# Altium PCB AT89S52S双L298驱动控制器.PCBDOC
Units mm, origin at the board's own origin, x right, y up, seen from the top; angles counter-clockwise.
Board outline 152.4 x 101.6 mm, 2 copper layers (Top Layer, Bottom Layer); 67 components, 59 nets, 237 pads, 2 vias.
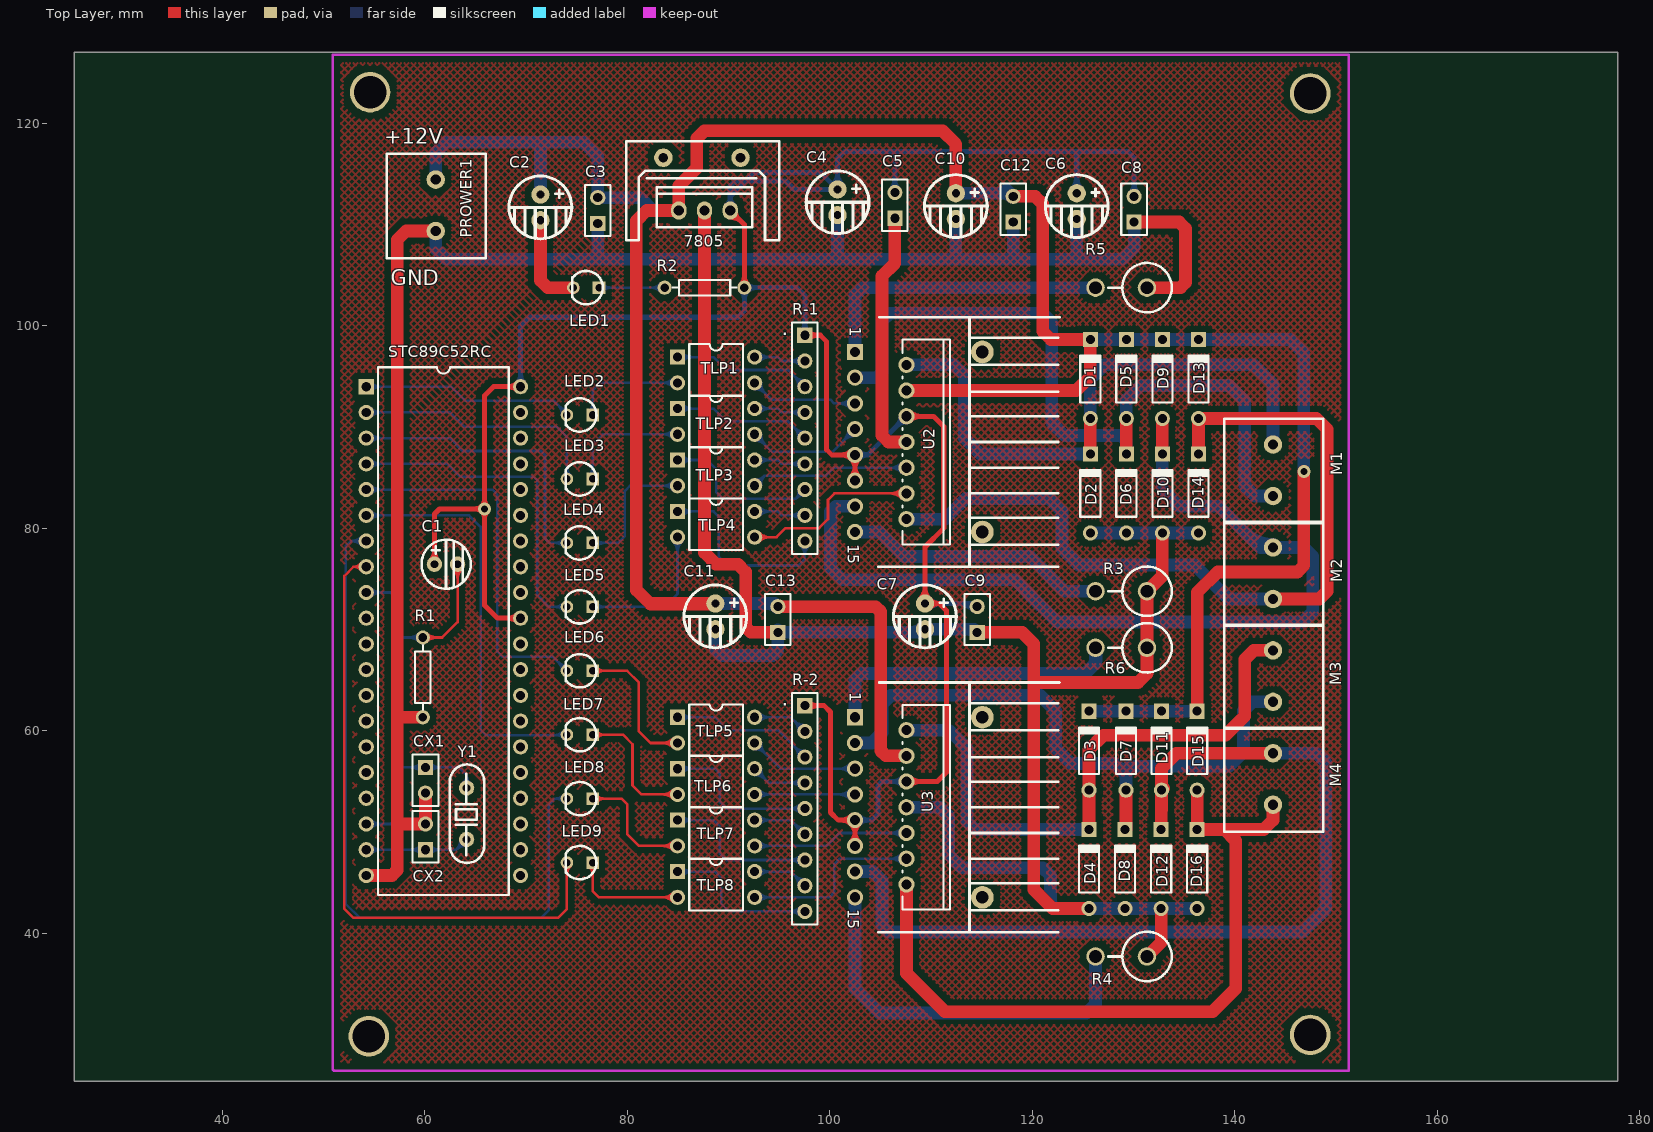
[diagram p0: Top Layer view]
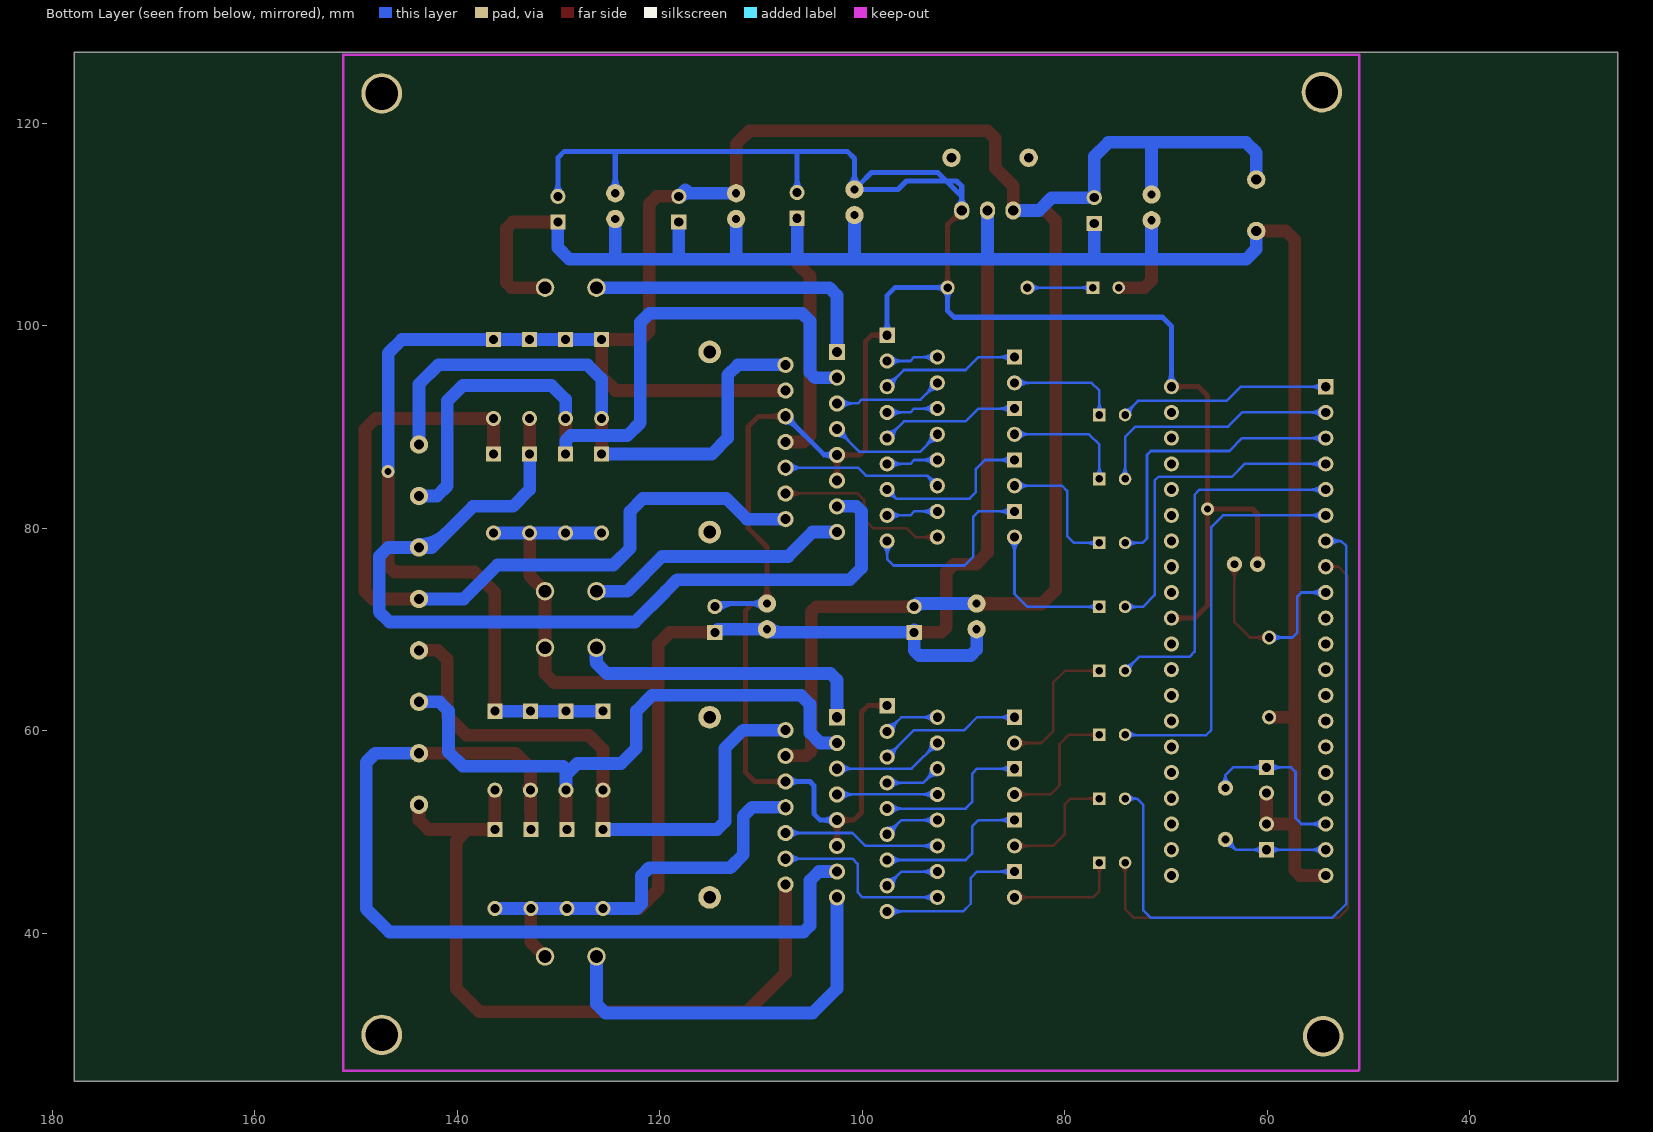
[diagram p1: Bottom Layer view, seen from below]

## Layer stack, top to bottom
Top Layer: signal copper 0.0356
Dielectric: dielectric 0.32, FR-4, Dk 4.8
Bottom Layer: signal copper 0.0356

## Board outline
25.4,25.4 177.8,25.4 177.8,127 25.4,127

## Design rules (kind name [scope] priority, off if disabled: settings)
Clearance [All] p1: gap=0.6
ComponentClearance [All] p1: gap=0.254 collisioncheckmode=3 verticalgap=0.254
PolygonConnect [All] p1: connectstyle=Relief reliefconductorwidth=0.254 reliefentries=4 polygonreliefangle="90 Angle"
RoutingVias [All] p1: holewidth=0.711 width=1.27 viastyle="Through Hole" minholewidth=0.711 minwidth=1.27 maxholewidth=0.711 maxwidth=1.27
SolderMaskExpansion [All] p1: expansion=0.102
TestPointUsage [All] p1: valid=0 allowmultiple=FALSE
Testpoint [All] p1: side=15 testpointundercomponent=TRUE minsize=1.016 maxsize=2.54 preferedsize=1.524 minholesize=0 maxholesize=1.016 preferedholesize=0.813 testpointgrid=0.025 style=1023 order=0-112345678
Width 1.2mm [InNetClass('1.2mm')] p1: maxlimit=1.254 minlimit=1.254 preferedwidth=1.254
Width 0.5mm [InNetClass('0.5mm')] p2: maxlimit=0.5 minlimit=0.5 preferedwidth=0.5
Width [All] p3: maxlimit=0.254 minlimit=0.254 preferedwidth=0.254
17 further rules are at their usual default settings.

## Classes and differential pairs
net class 0.5mm: +5V
net class 1.2mm: +12V GND NetD1_1 NetD3_1 NetD5_1 NetD7_1 NetD9_1 NetD11_1 NetD13_1 NetD15_1 NetR3_2 NetR4_2 NetR5_2 NetR6_2

## Components (designator, comment, footprint, x,y, rotation, side; value= is the part's Value field where it differs from the comment)
7805 "SDWYG" WYG 87.63,111.379 r0 top
C1 "10uf" C-DJ-4 63.373,73.914 r0 top
C2 "DJDR" C-DJ-6 71.501,110.363 r270 top
C3 "CPDR" CPDR 77.089,111.379 r90 top
C4 "DJDR" C-DJ-6 100.838,110.871 r270 top
C5 "CPDR" CPDR 106.426,111.887 r90 top
C6 "" C-DJ-6 124.46,110.49 r270 top
C7 "" C-DJ-6 109.474,69.977 r270 top
C8 "104" CPDR 130.048,111.506 r90 top
C9 "104" CPDR 114.554,70.993 r90 top
C10 "" C-DJ-6 112.522,110.49 r270 top
C11 "" C-DJ-6 88.773,69.977 r270 top
C12 "104" CPDR 118.11,111.506 r90 top
C13 "104" CPDR 94.869,70.993 r90 top
CX1 "30p" HDR1X2 60.071,56.388 r270 top
CX2 "30p" HDR1X2 60.071,48.26 r90 top
D1 "1N4007" DIO7.8-4.6x2 125.73,94.742 r90 top
D2 "1N4007" DIO7.8-4.6x2 125.73,83.439 r90 top
D3 "1N4007" DIO7.8-4.6x2 125.603,58.039 r90 top
D4 "1N4007" DIO7.8-4.6x2 125.603,46.355 r90 top
D5 "1N4007" DIO7.8-4.6x2 129.286,94.742 r90 top
D6 "1N4007" DIO7.8-4.6x2 129.286,83.439 r90 top
D7 "1N4007" DIO7.8-4.6x2 129.244,58.039 r90 top
D8 "1N4007" DIO7.8-4.6x2 129.159,46.355 r90 top
D9 "1N4007" DIO7.8-4.6x2 132.842,94.742 r90 top
D10 "1N4007" DIO7.8-4.6x2 132.842,83.439 r90 top
D11 "1N4007" DIO7.8-4.6x2 132.757,58.039 r90 top
D12 "1N4007" DIO7.8-4.6x2 132.715,46.355 r90 top
D13 "1N4007" DIO7.8-4.6x2 136.398,94.742 r90 top
D14 "1N4007" DIO7.8-4.6x2 136.398,83.439 r90 top
D15 "1N4007" DIO7.8-4.6x2 136.271,58.039 r90 top
D16 "1N4007" DIO7.8-4.6x2 136.271,46.355 r90 top
LED1 "LED" LED_D#1 75.438,102.235 r180 top
LED2 "" LED_D#2 74.803,92.71 r180 top
LED3 "" LED_D#2 74.803,86.396 r180 top
LED4 "" LED_D#2 74.803,80.083 r180 top
LED5 "" LED_D#2 74.803,73.769 r180 top
LED6 "" LED_D#2 74.803,67.455 r180 top
LED7 "" LED_D#2 74.803,61.141 r180 top
LED8 "" LED_D#2 74.803,54.828 r180 top
LED9 "" LED_D#2 74.803,48.514 r180 top
M1 "" DYDZ 144.907,87.757 r0 top
M2 "" DYDZ 144.907,77.597 r0 top
M3 "" DYDZ 144.907,67.437 r0 top
M4 "" DYDZ 144.907,57.277 r0 top
PROWER1 "PZ_2" DYDZ 62.23,113.919 r0 top
R1 "10k" RSE 59.817,65.278 r90 top
R2 "Res" RSE 87.63,103.759 r0 top
R3 "Res2" ZCDZL 128.778,71.247 r270 top
R4 "Res2" ZCDZL 128.778,35.179 r270 top
R5 "Res2" ZCDZL 128.778,101.219 r270 top
R6 "Res2" ZCDZL 128.778,65.659 r270 top
R-1 "" HDR1X9 97.536,78.74 r90 top
R-2 "" HDR1X9 97.536,42.164 r90 top
STC89C52RC "STC89C52RC" DIP-40 61.849,69.85 r270 top (schematic designator U1)
TLP1 "" DIP-4 88.773,95.631 r270 top (schematic designator TLP2)
TLP2 "" DIP-4 88.773,90.551 r270 top
TLP3 "" DIP-4 88.773,85.471 r270 top
TLP4 "" DIP-4 88.773,80.391 r270 top
TLP5 "" DIP-4 88.773,60.071 r270 top (schematic designator TLP6)
TLP6 "" DIP-4 88.773,54.991 r270 top
TLP7 "" DIP-4 88.773,49.911 r270 top
TLP8 "" DIP-4 88.773,44.831 r270 top
U2 "L298N" L298N 107.442,88.519 r270 top
U3 "L298N" L298N 107.442,52.451 r270 top
Y1 "Y" JZ_ZC 64.135,54.356 r90 top
? "Comment" SRP 87.376,112.776 r0 top

## Footprints (in the part's own frame and the unit in brackets; to place one, negate y for a bottom-side part, rotate by r counter-clockwise, add the part's x,y. Pads: shape width x height; smd on the part's side, far side on the other; paste and mask are expansions set on the pad)
C-DJ-4 [mil] "电容4mm"
  round 60 hole 30: 1(-95,100) 2(-5,100)
  silkscreen extent -145,5 46,195
C-DJ-6 [mm] "电容6mm"
  round 1.8 hole 0.8: 1(-2.591,-0.076) 2(-0.051,-0.076)
  silkscreen extent -4.42,-3.18 1.78,3.02
CPDR [mm] "瓷片电容"
  rect 1.5x1.5 hole 0.9: 1(-1.27,0)
  round 1.5 hole 0.9: 2(1.27,0)
  silkscreen extent -2.54,-1.27 2.54,1.27
DIO7.8-4.6x2 [mm] "Diode, Axial; Body 4.6 x 1.9 mm (LxDia. max), Lead Dia. 0.53 mm (max)"
  round 1.5 hole 0.9: 1(-3.9,0)
  rect 1.5x1.5 hole 0.9: 2(3.9,0)
  silkscreen extent -2.3,-1 2.4,1
DIP-4 [mm] "DIP; 4 Leads; Row Spacing 7.62 mm; Pitch 2.54 mm"
  rect 1.5x1.5 hole 0.9: 1(-1.27,-3.81)
  round 1.5 hole 0.9: 2(1.27,-3.81) 3(1.27,3.81) 4(-1.27,3.81)
  silkscreen extent -2.55,-2.65 2.55,2.65
DIP-40 [mm] "直插40管脚"
  rect 1.5x1.5 hole 0.9: 1(-24.13,-7.62)
  round 1.5 hole 0.9: 2(-21.59,-7.62) 3(-19.05,-7.62) 4(-16.51,-7.62) 5(-13.97,-7.62) 6(-11.43,-7.62) 7(-8.89,-7.62) 8(-6.35,-7.62) 9(-3.81,-7.62) 10(-1.27,-7.62) 11(1.27,-7.62) 12(3.81,-7.62) 13(6.35,-7.62) 14(8.89,-7.62) 15(11.43,-7.62) 16(13.97,-7.62) 17(16.51,-7.62) 18(19.05,-7.62) 19(21.59,-7.62) 20(24.13,-7.62) 21(24.13,7.62) 22(21.59,7.62) 23(19.05,7.62) 24(16.51,7.62) 25(13.97,7.62) 26(11.43,7.62) 27(8.89,7.62) 28(6.35,7.62) 29(3.81,7.62) 30(1.27,7.62) 31(-1.27,7.62) 32(-3.81,7.62) 33(-6.35,7.62) 34(-8.89,7.62) 35(-11.43,7.62) 36(-13.97,7.62) 37(-16.51,7.62) 38(-19.05,7.62) 39(-21.59,7.62) 40(-24.13,7.62)
  silkscreen extent -26.05,-6.45 26.05,6.45
DYDZ [mil] "接线端子"
  round 71.81 hole 39.37: 1(-45,20) 2(-45,-180)
  silkscreen extent -235,-285 150,120
HDR1X2 [mm] "Connector; Header; 2 Position"
  rect 1.5x1.5 hole 0.9: 1(0,0)
  round 1.5 hole 0.9: 2(2.54,0)
  silkscreen extent -1.27,-1.27 3.81,1.27
HDR1X9 [mm] "Connector; Header; 9 Position"
  round 1.5 hole 0.9: 1(0,0) 2(2.54,0) 3(5.08,0) 4(7.62,0) 5(10.16,0) 6(12.7,0) 7(15.24,0) 8(17.78,0)
  rect 1.5x1.5 hole 0.9: 9(20.32,0)
  silkscreen extent -1.27,-1.27 21.59,1.27
JZ_ZC [mil] "晶振"
  round 60 hole 30: 1(-200,0) 2(0,0)
  silkscreen extent -292,-68 92,65
L298N [mm] "直流/步进两用驱动器"
  round 2.24 hole 1.262: 0(-8.89,7.62) 0(8.89,7.62)
  rect 1.6x1.6 hole 1: 1(-8.89,-4.953)
  round 1.6 hole 1: 2(-7.62,0.127) 3(-6.35,-4.953) 4(-5.08,0.127) 5(-3.81,-4.953) 6(-2.54,0.127) 7(-1.27,-4.953) 8(0,0.127) 9(1.27,-4.953) 10(2.54,0.127) 11(3.81,-4.953) 12(5.08,0.127) 13(6.35,-4.953) 14(7.62,0.127) 15(8.89,-4.953)
  silkscreen extent -12.32,-2.67 12.32,15.24
LED_D#1 [mm] "发光二极管_3mm"
  rect 1.25x1.25 hole 0.75: 1(-1.778,-1.524)
  round 1.25 hole 0.75: 2(0.762,-1.524)
  silkscreen extent -2.16,-3.17 0.89,0.13
LED_D#2 [mm] "发光二极管_3mm"
  rect 1.25x1.25 hole 0.75: 1(-1.778,1.524)
  round 1.25 hole 0.75: 2(0.762,1.524)
  silkscreen extent -2.16,-0.13 0.89,3.17
RSE [mm] "直插电阻1/8W"
  round 1.4 hole 0.85: 1(-3.937,0) 2(3.937,0)
  silkscreen extent -3.17,-0.76 3.17,0.76
SRP [mm] "散热片78XX"
  round 1.824 hole 0.962: 0(-3.81,3.81) 0(3.81,3.81)
  silkscreen extent -7.49,-4.32 7.62,5.46
WYG [mm] "三端稳压器"
  oval 1.524x1.824 hole 1: 1(-2.54,0) 2(2.54,0) 3(0,0)
  silkscreen extent -4.7,-1.65 4.7,2.29
ZCDZL [mm] "直插电阻立式插"
  round 1.824 hole 1.262: 1(-2.54,2.54) 2(-2.54,-2.54)
  silkscreen extent -4.98,-1.27 -0.1,4.98

## Part data
7805: "三端稳压器"
C1: library part "CAPACITOR POL", "Capacitor"
C2 C4: "电解电容"
C3 C5: "瓷片电容"
C6 C7 C10 C11: library part "Cap Pol3", "Polarized Capacitor (Surface Mount)"
C8 C9 C12 C13: library part Cap, "Capacitor"
CX1 CX2: library part CAP, "Capacitor"
D1 D2 D3 D4 D5 D6 D7 D8 D9 D10 D11 D12 D13 D14 D15 D16: library part "Diode 1N4007", "1 Amp General Purpose Rectifier"
LED1: "发光二极管"
LED2 LED3 LED4 LED5 LED6 LED7 LED8 LED9: library part LED3, "Typical BLUE SiC LED"
M1 M2 M3 M4: library part MHDR1X2, "Header, 2-Pin"
PROWER1: "排针——2"
R1: library part RES2
R2: "电阻"
R3 R4 R5 R6: "Resistor"
R-1 R-2: library part "Header 9", "Header, 9-Pin"
STC89C52RC: library part AT89S52-P, "8 位微处理器/40引脚"
TLP1 TLP2 TLP3 TLP4 TLP5 TLP6 TLP7 TLP8: library part TLP521-1
U2 U3: "Dual Full Bridge Driver"
Y1: library part CRYSTAL, "Crystal"

## Free pads (board coordinates)
  round 4 hole 3.22: 0(54.483,29.845) 0(54.61,123.063) 0(147.447,29.972) 0(147.447,122.936)

## Via types
v1: diameter 1.27, hole 0.711, Top Layer to Bottom Layer, 2 vias

## Nets (pads, with @x,y where several pads share a name; then routed paths per layer and width w, separated by ;. In a path a pad name is that pad's centre, name@x,y a point inside that pad or via, vN(x,y) a via of type N, cw(c..) or ccw(c..) an arc to the next point about the centre after c; other vN are vias at no path point)
+5V: 7805.2 C1.1 C4.1 C5.2 C6.1 C7.1 C8.2 C9.2 R2.2 R-1.9 R-2.9 STC89C52RC.31 STC89C52RC.40 U2.6 U2.9 U2.11 U3.6 U3.9 U3.11 | length 328.8
  Top Layer w0.5: C1.1@60.598,76.816 ccw(c59.724,77.69) 60.96,77.69 ccw(c62.196,77.69) C1.1@61.322,76.816 ; C1.1 60.96,81.407 61.468,81.915 v1(65.913,81.915) ; v1@66.185,81.643 ccw(c66.842,80.986) 65.913,80.986 ccw(c64.984,80.986) 65.641,81.643 ccw(c64.984,80.986) 64.984,81.915 ccw(c64.984,82.844) 65.641,82.187 ccw(c64.984,82.844) 65.913,82.844 ccw(c66.842,82.844) v1@66.185,82.187 ; STC89C52RC.31@69.115,70.766 ccw(c68.262,69.913) 68.262,71.12 ccw(c68.262,72.327) STC89C52RC.31@69.115,71.474 ; STC89C52RC.40@69.115,93.626 ccw(c68.262,92.773) 68.262,93.98 ccw(c68.262,95.187) STC89C52RC.40@69.115,94.334 ; STC89C52RC.31 67.183,71.12 65.913,72.39 v1(65.913,81.915) ; STC89C52RC.40 66.802,93.98 65.913,93.091 v1(65.913,81.915) ; 7805.2@90.17,110.717 cw(c90.17,109.119) 91.3,110.249 ; 7805.2 91.567,109.982 91.567,104.013 91.44,103.886 R2.2 ; 7805.2@90.682,111.229 ccw(c91.556,111.229) 90.938,110.611 ; R2.2@91.249,104.077 ccw(c90.481,104.845) 91.567,104.845 ccw(c92.653,104.845) R2.2@91.885,104.077 ; R-2.9 99.441,62.484 100.076,61.849 100.076,51.943 100.838,51.181 U3.9 U3.11 ; R-1.9 99.06,99.06 99.695,98.425 99.695,87.757 100.203,87.249 U2.9 U2.11 ; R-2.9@97.89,62.13 cw(c98.743,61.277) 98.743,62.484 cw(c98.743,63.691) R-2.9@97.89,62.838 ; R-1.9@97.89,98.706 cw(c98.743,97.853) 98.743,99.06 cw(c98.743,100.267) R-1.9@97.89,99.414 ; U3.11@102.1,49.03 ccw(c101.161,49.969) 102.489,49.969 ccw(c103.817,49.969) U3.11@102.878,49.03 ; U3.9@102.1,51.57 cw(c101.161,52.509) 101.161,51.181 cw(c101.161,49.853) 102.1,50.792 cw(c101.161,49.853) 102.489,49.853 cw(c103.817,49.853) U3.9@102.878,50.792 ; U2.11@102.1,85.098 ccw(c101.161,86.037) 102.489,86.037 ccw(c103.817,86.037) U2.11@102.878,85.098 ; U2.9@102.1,87.638 cw(c101.161,88.577) 101.161,87.249 cw(c101.161,85.921) 102.1,86.86 cw(c101.161,85.921) 102.489,85.921 cw(c103.817,85.921) U2.9@102.878,86.86 ; U3.6 110.617,54.991 111.506,55.88 111.506,71.882 110.82,72.568 ; U2.6 110.236,91.059 111.252,90.043 111.252,80.01 109.398,78.156 C7.1 110.82,72.568 ; U3.6@107.958,54.602 cw(c108.897,53.663) 108.897,54.991 cw(c108.897,56.319) U3.6@107.958,55.38 ; U2.6@107.958,90.67 cw(c108.897,89.731) 108.897,91.059 cw(c108.897,92.387) U2.6@107.958,91.448 ; C7.1@108.938,73.027 ccw(c107.829,74.137) 109.398,74.137 ccw(c110.967,74.137) C7.1@109.857,73.027 ; C7.1@109.889,72.142 cw(c110.82,71.337) 110.82,72.568 ; C7.1@109.889,72.993 ccw(c110.82,73.799) 110.82,72.568
  Bottom Layer w0.5: STC89C52RC.40@69.115,94.334 ccw(c68.262,95.187) 69.469,95.187 ccw(c70.676,95.187) STC89C52RC.40@69.823,94.334 ; STC89C52RC.40 69.469,99.949 70.358,100.838 90.932,100.838 91.567,101.473 R2.2 96.774,103.759 97.536,102.997 R-1.9 ; 7805.2@89.808,111.891 ccw(c88.934,112.765) 90.17,112.765 ; 7805.2 90.17,112.765 ; 7805.2@90.532,111.891 cw(c91.406,112.765) 90.17,112.765 ; R2.2@91.249,103.441 cw(c90.481,102.673) 91.567,102.673 cw(c92.653,102.673) 91.885,103.441 cw(c92.653,102.673) 92.653,103.759 cw(c92.653,104.845) R2.2@91.885,104.077 ; R-1.9@97.182,99.414 ccw(c96.329,100.267) 97.536,100.267 ccw(c98.743,100.267) R-1.9@97.89,99.414 ; C4.1 96.469,113.462 95.631,114.3 91.705,114.3 ; C4.1@101.221,113.921 cw(c102.331,115.031) 100.762,115.031 ; U3.9 104.14,51.181 104.775,51.816 104.775,54.61 105.156,54.991 U3.6 ; U2.9 103.759,87.249 ; U3.9@102.878,50.792 cw(c103.817,49.853) 103.817,51.181 cw(c103.817,52.509) U3.9@102.878,51.57 ; U2.9@102.89,86.873 cw(c103.759,86.058) 103.759,87.249 ; U2.9@102.89,87.625 ccw(c103.759,88.44) 103.759,87.249 ; C5.2@106.072,113.511 ccw(c105.219,114.364) 106.426,114.364 ccw(c107.633,114.364) C5.2@106.78,113.511 ; C5.2 106.426,117.221 ; U2.6@107.019,91.059 cw(c105.691,91.059) 106.63,90.12 cw(c107.569,89.181) U2.6@107.569,90.509 ; U3.6@107.18,54.602 ccw(c106.241,53.663) 106.241,54.991 ccw(c106.241,56.319) U3.6@107.18,55.38 ; U2.6 103.759,87.249 ; C7.1 114.249,72.568 C9.2 ccw(c113.818,71.527) 113.818,72.568 ; C7.1@109.857,72.108 cw(c110.967,70.999) 110.967,72.568 cw(c110.967,74.137) C7.1@109.857,73.027 ; 112.611,72.568 cw(c112.611,70.32) C9.2@114.2,71.909 ; C6.1@123.924,113.54 ccw(c122.815,114.65) 124.384,114.65 ccw(c125.953,114.65) C6.1@124.843,113.54 ; C6.1 124.384,117.018 124.587,117.221 ; C8.2@129.694,113.13 ccw(c128.841,113.983) 130.048,113.983 ccw(c131.255,113.983) C8.2@130.402,113.13 ; C8.2 130.048,116.586 129.413,117.221 124.587,117.221 ; 90.17,112.765 91.705,114.3 ; 90.17,112.765 90.17,113.792 90.678,114.3 91.705,114.3 ; 91.705,114.3 92.543,115.138 99.085,115.138 100.302,113.921 ccw(c99.193,115.031) 100.762,115.031 ; 100.762,115.031 100.762,116.51 101.473,117.221 106.426,117.221 ; 106.426,117.221 124.587,117.221
+12V: 7805.1 C2.1 C3.2 C10.1 C11.1 C12.2 C13.2 D1.2 D3.2 D5.2 D7.2 D9.2 D11.2 D13.2 D15.2 PROWER1.1 U2.4 U3.4 | length 294.4
  Top Layer w1.254: C11.1@88.519,72.517 82.296,72.517 ; C11.1 82.347,72.568 82.296,72.517 ; C13.2 104.521,72.263 105.029,71.755 105.029,58.039 105.537,57.531 U3.4 ; U2.4 124.333,93.599 125.73,94.996 D1.2 121.83,98.642 121.031,99.441 121.031,112.014 120.269,112.776 C12.2 ; C10.1 112.446,117.932 111.125,119.253 87.63,119.253 86.868,118.491 86.868,115.57 85.09,113.792 7805.1 81.915,111.379 80.899,110.363 80.899,73.914 82.296,72.517 ; D15.2 136.271,73.66 138.303,75.692 146.177,75.692 146.812,76.327 v1(146.812,85.598)
  Bottom Layer w1.254: PROWER1.1 61.087,117.094 62.103,118.11 71.501,118.11 ; C2.1 71.425,118.034 71.501,118.11 ; 7805.1 82.55,111.379 81.28,112.649 C3.2 77.089,116.713 75.692,118.11 71.501,118.11 ; C11.1 94.564,72.568 C13.2 ; 93.836,72.568 cw(c93.836,71.23) C13.2@94.782,72.176 ; C10.1 117.119,113.081 ; 117.077,113.081 cw(c117.077,111.743) C12.2@118.023,112.689 ; C12.2@118.02,112.692 ccw(c117.119,111.843) 117.119,113.081 ; C12.2 117.462,113.424 117.119,113.081 ; D3.2 D7.2 D11.2 D15.2 ; D1.2 D5.2 D9.2 D13.2 145.452,98.642 146.812,97.282 v1(146.812,85.598)
GND: 7805.3 C2.2 C3.1 C4.2 C5.1 C6.2 C7.2 C8.1 C9.1 C10.2 C11.2 C12.1 C13.1 CX1.2 CX2.2 D2.1 D4.1 D6.1 D8.1 D10.1 D12.1 D14.1 D16.1 LED1.2 PROWER1.2 R1.1 R3.1 R4.1 R5.1 R6.1 STC89C52RC.20 U2.8 U3.8 | length 429.5
  Top Layer w1.254: STC89C52RC.20 56.769,45.72 57.277,46.228 57.277,50.8 ; R1.1 57.277,61.341 ; CX1.2 CX2.2 57.277,50.8 ; PROWER1.2 58.166,109.347 57.277,108.458 57.277,61.341 ; C2.2 71.425,104.47 72.136,103.759 LED1.2 ; 7805.3 87.63,77.597 88.773,76.454 90.932,76.454 91.694,75.692 91.694,70.231 92.202,69.723 C13.1 ; C5.1 106.426,106.172 105.156,104.902 105.156,89.154 105.791,88.519 U2.8 ; C9.1 118.999,69.723 120.142,68.58 120.142,64.77 ; D4.1 122.01,42.455 120.142,44.323 120.142,64.77 ; C8.1 134.493,110.236 135.128,109.601 135.128,104.267 134.62,103.759 R5.1 ; R4.1 132.715,39.116 D12.1 ; D10.1 132.842,75.311 R3.1 R6.1 131.318,65.659 130.429,64.77 120.142,64.77 ; 57.277,50.8 57.277,61.341
  Bottom Layer w1.254: PROWER1.2 61.087,107.569 62.103,106.553 71.501,106.553 ; C2.2 71.425,106.629 71.501,106.553 ; C3.1 77.089,106.553 ; 7805.3 87.63,106.68 87.503,106.553 ; C11.2 88.697,68.021 89.281,67.437 94.361,67.437 94.869,67.945 C13.1 ; C13.1@94.742,69.723 C13.1 ; C13.1@94.869,69.977 C13.1 ; C4.2 100.762,106.629 100.838,106.553 ; C5.1 106.426,106.68 106.553,106.553 ; U3.8 110.871,52.451 111.76,51.562 111.76,47.752 113.03,46.482 121.031,46.482 121.793,45.72 121.793,42.926 122.264,42.455 D4.1 D8.1 D12.1 D16.1 ; 108.003,69.723 ccw(c108.003,71.423) C7.2@109.205,70.221 ; C10.2 112.446,106.858 112.395,106.807 112.395,106.553 ; 113.521,70.028 cw(c113.521,68.69) C9.1@114.467,69.636 ; C9.1 114.249,70.028 C7.2 109.093,69.723 C13.1 ; C12.1 118.11,106.553 ; C6.2 124.384,106.604 124.333,106.553 ; D2.1 D6.1 D10.1 D14.1 ; C8.1 130.048,107.696 128.905,106.553 124.333,106.553 ; 71.501,106.553 77.089,106.553 ; 77.089,106.553 87.503,106.553 ; 87.503,106.553 100.838,106.553 ; 100.838,106.553 106.553,106.553 ; 106.553,106.553 112.395,106.553 ; 112.395,106.553 118.11,106.553 ; 118.11,106.553 124.333,106.553
NetC1_2: C1.2 R1.2 STC89C52RC.9 | length 33.7
  Top Layer w0.254: R1.2 61.722,69.215 63.246,70.739 C1.2 ; R1.2@60.043,68.989 cw(c60.587,68.445) 60.587,69.215 cw(c60.587,69.985) R1.2@60.043,69.441 ; R1.2@60.222,68.81 cw(c61.2,67.832) 61.2,69.215 cw(c61.2,70.598) R1.2@60.222,69.62 ; C1.2@62.797,76.005 cw(c61.713,74.921) 63.246,74.921 cw(c64.779,74.921) C1.2@63.695,76.005 ; C1.2@62.977,76.185 cw(c62.326,75.534) 63.246,75.534 cw(c64.166,75.534) C1.2@63.515,76.185
  Bottom Layer w0.254: STC89C52RC.9 56.642,73.66 57.023,73.279 57.023,69.723 57.531,69.215 R1.2 ; STC89C52RC.9@54.49,73.399 cw(c55.12,72.769) 55.12,73.66 cw(c55.12,74.551) STC89C52RC.9@54.49,73.921 ; STC89C52RC.9@54.67,73.219 cw(c55.733,72.156) 55.733,73.66 cw(c55.733,75.164) STC89C52RC.9@54.67,74.101 ; R1.2@59.412,68.81 ccw(c58.434,67.832) 58.434,69.215 ccw(c58.434,70.598) R1.2@59.412,69.62 ; R1.2@59.591,68.989 ccw(c59.047,68.445) 59.047,69.215 ccw(c59.047,69.985) R1.2@59.591,69.441
NetD1_1: D1.1 D2.2 M1.1 U2.2 | length 58.2
  Top Layer w1.254: D2.2 D1.1
  Bottom Layer w1.254: U2.2 112.268,96.139 113.284,95.123 113.284,88.9 114.845,87.339 D2.2 ; D1.1 125.73,94.742 127.127,96.139 141.859,96.139 143.764,94.234 M1.1
NetD3_1: D3.1 D4.2 M3.1 U3.2 | length 59.7
  Top Layer w1.254: D4.2 D3.1 125.603,58.166 127,59.563 139.065,59.563 140.97,61.468 140.97,67.056 141.859,67.945 M3.1
  Bottom Layer w1.254: U3.2 111.76,60.071 113.538,58.293 113.538,51.054 114.337,50.255 D4.2
NetD5_1: D5.1 D6.2 M1.2 U2.3 | length 74.6
  Top Layer w1.254: D6.2 D5.1
  Bottom Layer w1.254: U2.3 104.648,94.869 105.156,95.377 105.156,100.457 105.918,101.219 121.031,101.219 121.92,100.33 121.92,90.424 123.19,89.154 128.778,89.154 129.286,88.646 D6.2 ; D5.1 129.286,92.71 130.683,94.107 139.446,94.107 140.97,92.583 140.97,84.201 141.986,83.185 M1.2
NetD7_1: D7.1 D8.2 M3.2 U3.3 | length 61.4
  Top Layer w1.254: D8.2 129.244,50.34 D7.1
  Bottom Layer w1.254: U3.3 104.14,58.801 105.156,59.817 105.156,62.611 106.045,63.5 120.777,63.5 122.301,61.976 122.301,58.293 123.825,56.769 128.143,56.769 129.244,55.668 ; D7.1 129.244,55.668 ; M3.2 141.732,62.865 140.843,61.976 140.843,57.912 139.446,56.515 129.54,56.515 129.244,56.219 129.244,55.668
NetD9_1: D9.1 D10.2 M2.1 U2.13 | length 91.5
  Top Layer w1.254: D10.2 D9.1
  Bottom Layer w1.254: U2.13 100.584,82.169 100.076,81.661 100.076,76.073 101.219,74.93 118.262,74.93 119.436,73.757 119.436,73.731 122.428,70.739 146.685,70.739 147.701,71.755 147.701,77.216 146.812,78.105 M2.1 142.494,78.105 138.43,82.169 134.493,82.169 132.842,83.82 D10.2 ; 141.109,79.49 ccw(c143.764,82.144) M2.1@143.764,78.39
NetD11_1: D11.1 D12.2 M4.1 U3.13 | length 90.5
  Top Layer w1.254: D12.2 132.715,52.172 132.757,52.214 D11.1 ; D11.1@132.95,54.332 D11.1 ; M4.1 134.239,57.785 132.757,56.303 D11.1
  Bottom Layer w1.254: U3.13 104.267,46.101 105.156,45.212 105.156,40.767 105.791,40.132 146.685,40.132 148.971,42.418 148.971,56.896 148.082,57.785 M4.1
NetD13_1: D13.1 D14.2 M2.2 U2.14 | length 81.6
  Top Layer w1.254: D14.2 D13.1 148.045,90.842 149.098,89.789 149.098,73.787 148.336,73.025 M2.2
  Bottom Layer w1.254: U2.14 111.379,80.899 113.411,82.931 121.666,82.931 122.936,81.661 122.936,78.016 124.587,76.365 136.017,76.365 139.357,73.025 M2.2
NetD15_1: D15.1 D16.2 M4.2 U3.14 | length 73.3
  Top Layer w1.254: U3.14 107.569,36.068 111.379,32.258 137.795,32.258 140.081,34.544 140.081,49.149 138.975,50.255 ; D15.1 D16.2 138.975,50.255 ; M4.2 143.764,51.181 142.838,50.255 138.975,50.255
NetLED1_1: LED1.1 R2.1 | length 11.7
  Bottom Layer w0.254: LED1.1 R2.1 ; LED1.1@77.568,103.407 cw(c78.418,102.557) 78.418,103.759 cw(c78.418,104.961) LED1.1@77.568,104.111 ; R2.1@83.288,103.354 ccw(c82.31,102.376) 82.31,103.759 ccw(c82.31,105.142) R2.1@83.288,104.164 ; R2.1@83.467,103.533 ccw(c82.923,102.989) 82.923,103.759 ccw(c82.923,104.529) R2.1@83.467,103.985
NetLED2_1: LED2.1 TLP1.2 | length 16.8
  Bottom Layer w0.254: LED2.1@76.229,91.538 ccw(c75.379,92.388) 76.581,92.388 ccw(c77.783,92.388) LED2.1@76.933,91.538 ; LED2.1 76.581,93.599 77.343,94.361 TLP1.2 ; TLP1.2@84.522,93.92 ccw(c83.459,92.857) 83.459,94.361 ccw(c83.459,95.865) TLP1.2@84.522,94.802 ; TLP1.2@84.702,94.1 ccw(c84.072,93.47) 84.072,94.361 ccw(c84.072,95.252) TLP1.2@84.702,94.622
NetLED3_1: LED3.1 TLP2.2 | length 17.8
  Bottom Layer w0.254: LED3.1@76.229,85.224 ccw(c75.379,86.075) 76.581,86.075 ccw(c77.783,86.075) LED3.1@76.933,85.224 ; LED3.1 76.581,88.265 77.597,89.281 TLP2.2 ; TLP2.2@84.522,88.84 ccw(c83.459,87.777) 83.459,89.281 ccw(c83.459,90.785) TLP2.2@84.522,89.722 ; TLP2.2@84.702,89.02 ccw(c84.072,88.39) 84.072,89.281 ccw(c84.072,90.172) TLP2.2@84.702,89.542
NetLED4_1: LED4.1 TLP3.2 | length 19
  Bottom Layer w0.254: LED4.1 79.067,78.559 79.756,79.248 79.756,83.693 80.264,84.201 TLP3.2 ; LED4.1@76.933,78.206 cw(c77.783,77.356) 77.783,78.559 cw(c77.783,79.761) LED4.1@76.933,78.911 ; TLP3.2@84.522,83.76 ccw(c83.459,82.697) 83.459,84.201 ccw(c83.459,85.705) TLP3.2@84.522,84.642 ; TLP3.2@84.702,83.94 ccw(c84.072,83.31) 84.072,84.201 ccw(c84.072,85.092) TLP3.2@84.702,84.462
NetLED5_1: LED5.1 TLP4.2 | length 20.2
  Bottom Layer w0.254: LED5.1 83.675,72.245 84.963,73.533 TLP4.2 ; LED5.1@76.933,71.893 cw(c77.783,71.043) 77.783,72.245 cw(c77.783,73.447) LED5.1@76.933,72.597 ; TLP4.2@84.522,78.68 cw(c83.459,77.617) 84.963,77.617 cw(c86.467,77.617) TLP4.2@85.404,78.68 ; TLP4.2@84.702,78.86 cw(c84.072,78.23) 84.963,78.23 cw(c85.854,78.23) TLP4.2@85.224,78.86
NetLED6_1: LED6.1 TLP5.2 | length 19.8
  Top Layer w0.254: LED6.1 79.992,65.931 81.153,64.77 81.153,59.944 82.296,58.801 TLP5.2 ; LED6.1@76.933,65.579 cw(c77.783,64.729) 77.783,65.931 cw(c77.783,67.133) LED6.1@76.933,66.283 ; TLP5.2@84.522,58.36 ccw(c83.459,57.297) 83.459,58.801 ccw(c83.459,60.305) TLP5.2@84.522,59.242 ; TLP5.2@84.702,58.54 ccw(c84.072,57.91) 84.072,58.801 ccw(c84.072,59.692) TLP5.2@84.702,59.062
NetLED7_1: LED7.1 TLP6.2 | length 18.9
  Top Layer w0.254: LED7.1 79.575,59.617 80.518,58.674 80.518,54.61 81.407,53.721 TLP6.2 ; LED7.1@76.933,59.265 cw(c77.783,58.415) 77.783,59.617 cw(c77.783,60.82) LED7.1@76.933,59.97 ; TLP6.2@84.522,53.28 ccw(c83.459,52.217) 83.459,53.721 ccw(c83.459,55.225) TLP6.2@84.522,54.162 ; TLP6.2@84.702,53.46 ccw(c84.072,52.83) 84.072,53.721 ccw(c84.072,54.612) TLP6.2@84.702,53.982
NetLED8_1: LED8.1 TLP7.2 | length 17.7
  Top Layer w0.254: LED8.1 79.411,53.304 80.01,52.705 80.01,49.784 81.153,48.641 TLP7.2 ; LED8.1@76.933,52.952 cw(c77.783,52.101) 77.783,53.304 cw(c77.783,54.506) LED8.1@76.933,53.656 ; TLP7.2@84.522,48.2 ccw(c83.459,47.137) 83.459,48.641 ccw(c83.459,50.145) TLP7.2@84.522,49.082 ; TLP7.2@84.702,48.38 ccw(c84.072,47.75) 84.072,48.641 ccw(c84.072,49.532) TLP7.2@84.702,48.902
NetLED9_1: LED9.1 TLP8.2 | length 17.1
  Top Layer w0.254: LED9.1@76.229,46.638 cw(c75.379,45.788) 76.581,45.788 cw(c77.783,45.788) LED9.1@76.933,46.638 ; LED9.1 76.581,44.196 77.216,43.561 TLP8.2 ; TLP8.2@84.522,43.12 ccw(c83.459,42.057) 83.459,43.561 ccw(c83.459,45.065) TLP8.2@84.522,44.002 ; TLP8.2@84.702,43.3 ccw(c84.072,42.67) 84.072,43.561 ccw(c84.072,44.452) TLP8.2@84.702,43.822
NetR3_2: R3.2 U2.15 | length 26.2
  Bottom Layer w1.254: U2.15 104.902,79.629 107.315,77.216 119.761,77.216 123.19,73.787 R3.2
NetR4_2: R4.2 U3.15 | length 38.8
  Bottom Layer w1.254: U3.15 102.489,34.544 104.902,32.131 125.349,32.131 126.238,33.02 R4.2
NetR5_2: R5.2 U2.1 | length 29.7
  Bottom Layer w1.254: U2.1 102.489,102.997 103.251,103.759 R5.2
NetR6_2: R6.2 U3.1 | length 31.4
  Bottom Layer w1.254: U3.1 102.489,65.024 103.124,65.659 125.222,65.659 126.238,66.675 R6.2 ; 125.984,66.421 ccw(c125.168,67.237) R6.2@126.026,68.008
NetTLP1_3: TLP1.3 U2.5 | length 18.7
  Bottom Layer w0.254: TLP1.3@92.583,93.738 cw(c92.583,92.234) 93.647,93.297 cw(c94.71,94.361) TLP1.3@93.206,94.361 ; TLP1.3@92.583,93.992 cw(c92.583,93.101) 93.213,93.731 cw(c93.843,94.361) TLP1.3@92.952,94.361 ; TLP1.3 94.234,92.71 100.051,92.71 100.432,92.329 U2.5 ; U2.5@102.013,91.853 ccw(c100.864,90.704) 100.864,92.329 ccw(c100.864,93.954) U2.5@102.013,92.805 ; U2.5@102.193,92.033 ccw(c101.477,91.317) 101.477,92.329 ccw(c101.477,93.341) U2.5@102.193,92.625
NetTLP2_3: TLP2.3 U2.7 | length 19.5
  Bottom Layer w0.254: TLP2.3@92.583,88.658 cw(c92.583,87.154) 93.647,88.217 cw(c94.71,89.281) TLP2.3@93.206,89.281 ; TLP2.3@92.583,88.912 cw(c92.583,88.021) 93.213,88.651 cw(c93.843,89.281) TLP2.3@92.952,89.281 ; TLP2.3 94.31,87.554 100.254,87.554 U2.7 ; U2.7@101.816,89.789 cw(c100.191,89.789) 101.34,88.64 cw(c102.489,87.491) U2.7@102.489,89.116 ; U2.7@102.07,89.789 cw(c101.058,89.789) 101.774,89.074 cw(c102.489,88.358) U2.7@102.489,89.37
NetTLP3_3: TLP3.3 U2.10 | length 23.2
  Bottom Layer w0.254: TLP3.3 93.574,85.192 ; TLP3.3@92.602,84.57 ccw(c92.641,85.317) 93.17,84.788 ccw(c93.699,84.259) TLP3.3@92.952,84.22 ; TLP3.3@92.615,84.823 ccw(c92.68,86.085) 93.574,85.192 ; TLP3.3@93.205,84.233 cw(c94.467,84.298) 93.574,85.192 ; U2.10@107.093,85.503 ccw(c105.944,84.354) 105.944,85.979 ccw(c105.944,87.604) U2.10@107.093,86.455 ; U2.10@107.273,85.683 ccw(c106.557,84.967) 106.557,85.979 ccw(c106.557,86.991) U2.10@107.273,86.275 ; U2.10 100.432,85.979 99.644,85.192 93.574,85.192
NetTLP4_3: TLP4.3 U2.12 | length 25.8
  Top Layer w0.254: TLP4.3 94.742,79.121 95.631,80.01 98.933,80.01 99.822,80.899 99.822,82.804 100.457,83.439 U2.12 ; TLP4.3@92.844,78.86 cw(c93.474,78.23) 93.474,79.121 cw(c93.474,80.012) TLP4.3@92.844,79.382 ; TLP4.3@93.024,78.68 cw(c94.087,77.617) 94.087,79.121 cw(c94.087,80.625) TLP4.3@93.024,79.562 ; U2.12@107.093,82.963 ccw(c105.944,81.814) 105.944,83.439 ccw(c105.944,85.064) U2.12@107.093,83.915 ; U2.12@107.273,83.143 ccw(c106.557,82.427) 106.557,83.439 ccw(c106.557,84.451) U2.12@107.273,83.735
NetTLP5_3: TLP5.3 U3.5 | length 18.9
  Bottom Layer w0.254: TLP5.3@92.583,58.178 cw(c92.583,56.674) 93.647,57.737 cw(c94.71,58.801) TLP5.3@93.206,58.801 ; TLP5.3@92.583,58.432 cw(c92.583,57.541) 93.213,58.171 cw(c93.843,58.801) TLP5.3@92.952,58.801 ; TLP5.3 95.123,56.261 U3.5 ; U3.5@102.013,55.785 ccw(c100.864,54.636) 100.864,56.261 ccw(c100.864,57.886) U3.5@102.013,56.737 ; U3.5@102.193,55.965 ccw(c101.477,55.249) 101.477,56.261 ccw(c101.477,57.273) U3.5@102.193,56.557
NetTLP6_3: TLP6.3 U3.7 | length 17.8
  Bottom Layer w0.254: TLP6.3 U3.7 ; TLP6.3@92.844,53.46 cw(c93.474,52.83) 93.474,53.721 cw(c93.474,54.612) TLP6.3@92.844,53.982 ; TLP6.3@93.024,53.28 cw(c94.087,52.217) 94.087,53.721 cw(c94.087,55.225) TLP6.3@93.024,54.162 ; U3.7@102.013,53.245 ccw(c100.864,52.096) 100.864,53.721 ccw(c100.864,55.346) U3.7@102.013,54.197 ; U3.7@102.193,53.425 ccw(c101.477,52.709) 101.477,53.721 ccw(c101.477,54.733) U3.7@102.193,54.017
NetTLP7_3: TLP7.3 U3.10 | length 23.4
  Bottom Layer w0.254: TLP7.3 99.695,48.641 100.965,49.911 U3.10 ; TLP7.3@92.844,48.38 cw(c93.474,47.75) 93.474,48.641 cw(c93.474,49.532) TLP7.3@92.844,48.902 ; TLP7.3@93.024,48.2 cw(c94.087,47.137) 94.087,48.641 cw(c94.087,50.145) TLP7.3@93.024,49.082 ; U3.10@107.093,49.435 ccw(c105.944,48.286) 105.944,49.911 ccw(c105.944,51.536) U3.10@107.093,50.387 ; U3.10@107.273,49.615 ccw(c106.557,48.899) 106.557,49.911 ccw(c106.557,50.923) U3.10@107.273,50.207
NetTLP8_3: TLP8.3 U3.12 | length 26.1
  Bottom Layer w0.254: TLP8.3 99.949,43.561 100.457,44.069 100.457,46.863 100.965,47.371 U3.12 ; TLP8.3@92.844,43.3 cw(c93.474,42.67) 93.474,43.561 cw(c93.474,44.452) TLP8.3@92.844,43.822 ; TLP8.3@93.024,43.12 cw(c94.087,42.057) 94.087,43.561 cw(c94.087,45.065) TLP8.3@93.024,44.002 ; U3.12@107.093,46.895 ccw(c105.944,45.746) 105.944,47.371 ccw(c105.944,48.996) U3.12@107.093,47.847 ; U3.12@107.273,47.075 ccw(c106.557,46.359) 106.557,47.371 ccw(c106.557,48.383) U3.12@107.273,47.667
P1.0: LED2.2 STC89C52RC.1 | length 27.4
  Bottom Layer w0.254: STC89C52RC.1 62.611,93.98 64.008,92.583 72.771,92.583 74.041,91.313 LED2.2 ; STC89C52RC.1@54.49,93.719 cw(c55.12,93.089) 55.12,93.98 cw(c55.12,94.871) STC89C52RC.1@54.49,94.241 ; STC89C52RC.1@54.67,93.539 cw(c55.733,92.476) 55.733,93.98 cw(c55.733,95.484) STC89C52RC.1@54.67,94.421 ; 73.101,92.253 cw(c72.034,91.186) LED2.2@73.543,91.186 ; 73.408,91.946 ccw(c74.041,92.58) LED2.2@74.041,91.684 ; 73.535,91.819 cw(c72.901,91.186) LED2.2@73.797,91.186
P1.1: LED3.2 STC89C52RC.2 | length 30.6
  Bottom Layer w0.254: STC89C52RC.2 62.484,91.44 63.881,90.043 73.025,90.043 74.041,89.027 LED3.2 ; STC89C52RC.2@54.49,91.179 cw(c55.12,90.549) 55.12,91.44 cw(c55.12,92.331) STC89C52RC.2@54.49,91.701 ; STC89C52RC.2@54.67,90.999 cw(c55.733,89.936) 55.733,91.44 cw(c55.733,92.944) STC89C52RC.2@54.67,91.881 ; LED3.2@73.689,85.224 ccw(c72.839,86.075) 74.041,86.075 ccw(c75.243,86.075) LED3.2@74.393,85.224
P1.2: LED4.2 STC89C52RC.3 | length 34.6
  Bottom Layer w0.254: STC89C52RC.3 62.484,88.9 63.754,87.63 71.501,87.63 71.882,87.249 71.882,78.994 72.317,78.559 LED4.2 ; STC89C52RC.3@54.49,88.639 cw(c55.12,88.009) 55.12,88.9 cw(c55.12,89.791) STC89C52RC.3@54.49,89.161 ; STC89C52RC.3@54.67,88.459 cw(c55.733,87.396) 55.733,88.9 cw(c55.733,90.404) STC89C52RC.3@54.67,89.341 ; LED4.2@73.689,78.206 ccw(c72.839,77.356) 72.839,78.559 ccw(c72.839,79.761) LED4.2@73.689,78.911
P1.3: LED5.2 STC89C52RC.4 | length 37.9
  Bottom Layer w0.254: STC89C52RC.4 62.23,86.36 63.5,85.09 70.739,85.09 71.12,84.709 71.12,73.406 72.281,72.245 LED5.2 ; STC89C52RC.4@54.49,86.099 cw(c55.12,85.469) 55.12,86.36 cw(c55.12,87.251) STC89C52RC.4@54.49,86.621 ; STC89C52RC.4@54.67,85.919 cw(c55.733,84.856) 55.733,86.36 cw(c55.733,87.864) STC89C52RC.4@54.67,86.801 ; LED5.2@73.689,71.893 ccw(c72.839,71.043) 72.839,72.245 ccw(c72.839,73.447) LED5.2@73.689,72.597
P1.4: LED6.2 STC89C52RC.5 | length 41.9
  Bottom Layer w0.254: STC89C52RC.5 66.675,83.82 67.183,83.312 67.183,67.818 67.691,67.31 72.662,67.31 LED6.2 ; STC89C52RC.5@54.49,83.559 cw(c55.12,82.929) 55.12,83.82 cw(c55.12,84.711) STC89C52RC.5@54.49,84.081 ; STC89C52RC.5@54.67,83.379 cw(c55.733,82.316) 55.733,83.82 cw(c55.733,85.324) STC89C52RC.5@54.67,84.261 ; LED6.2@73.543,65.931 ccw(c72.341,65.931) 73.191,66.781 ccw(c74.041,67.631) LED6.2@74.041,66.429
P1.5: LED7.2 STC89C52RC.6 | length 46.8
  Bottom Layer w0.254: STC89C52RC.6 64.389,81.28 65.532,80.137 65.532,60.071 66.04,59.563 73.987,59.563 LED7.2 ; STC89C52RC.6@54.49,81.019 cw(c55.12,80.389) 55.12,81.28 cw(c55.12,82.171) STC89C52RC.6@54.49,81.541 ; STC89C52RC.6@54.67,80.839 cw(c55.733,79.776) 55.733,81.28 cw(c55.733,82.784) STC89C52RC.6@54.67,81.721 ; 72.707,59.563 ccw(c72.707,60.951) LED7.2@73.689,59.97 ; 72.97,59.563 cw(c72.97,58.546) LED7.2@73.689,59.265 ; 73.321,59.563 ccw(c73.321,60.338) LED7.2@73.868,59.79
P1.6: LED8.2 STC89C52RC.7 | length 76.5
  Bottom Layer w0.254: STC89C52RC.7@53.788,78.299 ccw(c52.725,77.236) 52.725,78.74 ccw(c52.725,80.244) STC89C52RC.7@53.788,79.181 ; STC89C52RC.7@53.968,78.479 ccw(c53.338,77.849) 53.338,78.74 ccw(c53.338,79.631) STC89C52RC.7@53.968,79.001 ; STC89C52RC.7 52.705,78.74 52.197,78.232 52.197,42.926 53.594,41.529 71.501,41.529 72.263,42.291 72.263,52.705 72.862,53.304 ; LED8.2@73.684,52.956 ccw(c72.862,52.157) 72.862,53.304 ; LED8.2@73.684,53.651 cw(c72.862,54.451) 72.862,53.304 ; LED8.2 72.862,53.304
P1.7: LED9.2 STC89C52RC.8 | length 67.4
  Top Layer w0.254: STC89C52RC.8@53.736,75.819 ccw(c52.959,75.217) 52.959,76.2 ; STC89C52RC.8@53.736,76.581 cw(c52.959,77.183) 52.959,76.2 ; STC89C52RC.8@53.937,75.974 ccw(c53.477,75.618) 53.477,76.2 ccw(c53.477,76.782) STC89C52RC.8@53.937,76.426 ; STC89C52RC.8 52.959,76.2 ; LED9.2@73.689,46.638 cw(c72.839,45.788) 74.041,45.788 cw(c75.243,45.788) LED9.2@74.393,46.638 ; LED9.2 74.041,42.418 73.152,41.529 52.959,41.529 52.07,42.418 52.07,75.311 52.959,76.2
TLP00: R-1.5 TLP2.1 | length 21.3
  Bottom Layer w0.254: TLP2.1 88.519,91.821 89.789,90.551 95.885,90.551 R-1.5 ; TLP2.1@85.224,91.56 cw(c85.854,90.93) 85.854,91.821 cw(c85.854,92.712) TLP2.1@85.224,92.082 ; TLP2.1@85.404,91.38 cw(c86.467,90.317) 86.467,91.821 cw(c86.467,93.325) TLP2.1@85.404,92.262 ; R-1.5@96.913,88.9 ccw(c95.409,88.9) 96.472,89.964 ccw(c97.536,91.027) R-1.5@97.536,89.523 ; R-1.5@97.167,88.9 ccw(c96.276,88.9) 96.906,89.53 ccw(c97.536,90.16) R-1.5@97.536,89.269
TLP01: R-1.7 TLP1.1 | length 21.3
  Bottom Layer w0.254: TLP1.1 88.519,96.901 89.789,95.631 95.885,95.631 R-1.7 ; TLP1.1@85.224,96.64 cw(c85.854,96.01) 85.854,96.901 cw(c85.854,97.792) TLP1.1@85.224,97.162 ; TLP1.1@85.404,96.46 cw(c86.467,95.397) 86.467,96.901 cw(c86.467,98.405) TLP1.1@85.404,97.342 ; R-1.7@96.913,93.98 ccw(c95.409,93.98) 96.472,95.044 ccw(c97.536,96.107) R-1.7@97.536,94.603 ; R-1.7@97.167,93.98 ccw(c96.276,93.98) 96.906,94.61 ccw(c97.536,95.24) R-1.7@97.536,94.349
TLP02: R-1.3 TLP3.1 | length 21.4
  Bottom Layer w0.254: TLP3.1 87.884,86.741 88.773,85.852 88.773,83.566 89.408,82.931 96.647,82.931 ; TLP3.1@85.224,86.48 cw(c85.854,85.85) 85.854,86.741 cw(c85.854,87.632) TLP3.1@85.224,87.002 ; TLP3.1@85.404,86.3 cw(c86.467,85.237) 86.467,86.741 cw(c86.467,88.245) TLP3.1@85.404,87.182 ; R-1.3@96.919,83.736 cw(c95.97,83.608) 96.647,82.931 ; R-1.3@97.452,83.203 ccw(c97.324,82.254) 96.647,82.931 ; R-1.3 96.647,82.931
TLP03: R-1.1 TLP4.1 | length 26.7
  Bottom Layer w0.254: TLP4.1 88.519,81.661 89.027,81.153 89.027,77.216 89.916,76.327 96.901,76.327 97.536,76.962 R-1.1 ; TLP4.1@85.224,81.4 cw(c85.854,80.77) 85.854,81.661 cw(c85.854,82.552) TLP4.1@85.224,81.922 ; TLP4.1@85.404,81.22 cw(c86.467,80.157) 86.467,81.661 cw(c86.467,83.165) TLP4.1@85.404,82.102 ; R-1.1@97.095,78.299 cw(c96.032,77.236) 97.536,77.236 cw(c99.04,77.236) R-1.1@97.977,78.299 ; R-1.1@97.275,78.479 cw(c96.645,77.849) 97.536,77.849 cw(c98.427,77.849) R-1.1@97.797,78.479
TLP04: R-1.8 TLP1.4 | length 12.6
  Bottom Layer w0.254: TLP1.4 94.869,96.901 95.25,96.52 R-1.8 ; TLP1.4@92.844,96.64 cw(c93.474,96.01) 93.474,96.901 cw(c93.474,97.792) TLP1.4@92.844,97.162 ; TLP1.4@93.024,96.46 cw(c94.087,95.397) 94.087,96.901 cw(c94.087,98.405) TLP1.4@93.024,97.342 ; R-1.8@97.095,96.079 ccw(c96.032,95.016) 96.032,96.52 ccw(c96.032,98.024) R-1.8@97.095,96.961 ; R-1.8@97.275,96.259 ccw(c96.645,95.629) 96.645,96.52 ccw(c96.645,97.411) R-1.8@97.275,96.781
TLP05: R-1.6 TLP2.4 | length 12.6
  Bottom Layer w0.254: TLP2.4 94.869,91.821 95.25,91.44 R-1.6 ; TLP2.4@92.844,91.56 cw(c93.474,90.93) 93.474,91.821 cw(c93.474,92.712) TLP2.4@92.844,92.082 ; TLP2.4@93.024,91.38 cw(c94.087,90.317) 94.087,91.821 cw(c94.087,93.325) TLP2.4@93.024,92.262 ; R-1.6@97.095,90.999 ccw(c96.032,89.936) 96.032,91.44 ccw(c96.032,92.944) R-1.6@97.095,91.881 ; R-1.6@97.275,91.179 ccw(c96.645,90.549) 96.645,91.44 ccw(c96.645,92.331) R-1.6@97.275,91.701
TLP06: R-1.4 TLP3.4 | length 12.6
  Bottom Layer w0.254: TLP3.4 94.869,86.741 95.25,86.36 R-1.4 ; TLP3.4@92.844,86.48 cw(c93.474,85.85) 93.474,86.741 cw(c93.474,87.632) TLP3.4@92.844,87.002 ; TLP3.4@93.024,86.3 cw(c94.087,85.237) 94.087,86.741 cw(c94.087,88.245) TLP3.4@93.024,87.182 ; R-1.4@97.095,85.919 ccw(c96.032,84.856) 96.032,86.36 ccw(c96.032,87.864) R-1.4@97.095,86.801 ; R-1.4@97.275,86.099 ccw(c96.645,85.469) 96.645,86.36 ccw(c96.645,87.251) R-1.4@97.275,86.621
TLP07: R-1.2 TLP4.4 | length 12.6
  Bottom Layer w0.254: TLP4.4 94.869,81.661 95.25,81.28 R-1.2 ; TLP4.4@92.844,81.4 cw(c93.474,80.77) 93.474,81.661 cw(c93.474,82.552) TLP4.4@92.844,81.922 ; TLP4.4@93.024,81.22 cw(c94.087,80.157) 94.087,81.661 cw(c94.087,83.165) TLP4.4@93.024,82.102 ; R-1.2@97.095,80.839 ccw(c96.032,79.776) 96.032,81.28 ccw(c96.032,82.784) R-1.2@97.095,81.721 ; R-1.2@97.275,81.019 ccw(c96.645,80.389) 96.645,81.28 ccw(c96.645,82.171) R-1.2@97.275,81.541
TLP10: R-2.5 TLP6.1 | length 23.4
  Bottom Layer w0.254: TLP6.1 88.646,56.261 89.154,55.753 89.154,52.959 89.789,52.324 R-2.5 ; TLP6.1@85.224,56 cw(c85.854,55.37) 85.854,56.261 cw(c85.854,57.152) TLP6.1@85.224,56.522 ; TLP6.1@85.404,55.82 cw(c86.467,54.757) 86.467,56.261 cw(c86.467,57.765) TLP6.1@85.404,56.702 ; R-2.5@97.095,51.883 ccw(c96.032,50.82) 96.032,52.324 ccw(c96.032,53.828) R-2.5@97.095,52.765 ; R-2.5@97.275,52.063 ccw(c96.645,51.433) 96.645,52.324 ccw(c96.645,53.215) R-2.5@97.275,52.585
TLP11: R-2.7 TLP5.1 | length 21.7
  Bottom Layer w0.254: TLP5.1 88.646,61.341 89.916,60.071 94.869,60.071 R-2.7 ; TLP5.1@85.224,61.08 cw(c85.854,60.45) 85.854,61.341 cw(c85.854,62.232) TLP5.1@85.224,61.602 ; TLP5.1@85.404,60.9 cw(c86.467,59.837) 86.467,61.341 cw(c86.467,62.845) TLP5.1@85.404,61.782 ; R-2.7@96.913,57.404 ccw(c95.409,57.404) 96.472,58.468 ccw(c97.536,59.531) R-2.7@97.536,58.027 ; R-2.7@97.167,57.404 ccw(c96.276,57.404) 96.906,58.034 ccw(c97.536,58.664) R-2.7@97.536,57.773
TLP12: R-2.3 TLP7.1 | length 23.3
  Bottom Layer w0.254: TLP7.1 88.519,51.181 89.154,50.546 89.154,47.879 89.789,47.244 R-2.3 ; TLP7.1@85.224,50.92 cw(c85.854,50.29) 85.854,51.181 cw(c85.854,52.072) TLP7.1@85.224,51.442 ; TLP7.1@85.404,50.74 cw(c86.467,49.677) 86.467,51.181 cw(c86.467,52.685) TLP7.1@85.404,51.622 ; R-2.3@97.095,46.803 ccw(c96.032,45.74) 96.032,47.244 ccw(c96.032,48.748) R-2.3@97.095,47.685 ; R-2.3@97.275,46.983 ccw(c96.645,46.353) 96.645,47.244 ccw(c96.645,48.135) R-2.3@97.275,47.505
TLP13: R-2.1 TLP8.1 | length 23.2
  Bottom Layer w0.254: TLP8.1 88.646,46.101 89.281,45.466 89.281,42.926 90.043,42.164 R-2.1 ; TLP8.1@85.224,45.84 cw(c85.854,45.21) 85.854,46.101 cw(c85.854,46.992) TLP8.1@85.224,46.362 ; TLP8.1@85.404,45.66 cw(c86.467,44.597) 86.467,46.101 cw(c86.467,47.605) TLP8.1@85.404,46.542 ; R-2.1@97.095,41.723 ccw(c96.032,40.66) 96.032,42.164 ccw(c96.032,43.668) R-2.1@97.095,42.605 ; R-2.1@97.275,41.903 ccw(c96.645,41.273) 96.645,42.164 ccw(c96.645,43.055) R-2.1@97.275,42.425
TLP14: R-2.8 TLP5.4 | length 13.1
  Bottom Layer w0.254: TLP5.4 96.139,61.341 R-2.8 ; TLP5.4@92.844,61.08 cw(c93.474,60.45) 93.474,61.341 cw(c93.474,62.232) TLP5.4@92.844,61.602 ; TLP5.4@93.024,60.9 cw(c94.087,59.837) 94.087,61.341 cw(c94.087,62.845) TLP5.4@93.024,61.782 ; R-2.8@96.913,59.944 ccw(c95.409,59.944) 96.472,61.008 ccw(c97.536,62.071) R-2.8@97.536,60.567 ; R-2.8@97.167,59.944 ccw(c96.276,59.944) 96.906,60.574 ccw(c97.536,61.204) R-2.8@97.536,60.313
TLP15: R-2.6 TLP6.4 | length 13.1
  Bottom Layer w0.254: TLP6.4@92.583,55.638 cw(c92.583,54.134) 93.647,55.197 cw(c94.71,56.261) TLP6.4@93.206,56.261 ; TLP6.4@92.583,55.892 cw(c92.583,55.001) 93.213,55.631 cw(c93.843,56.261) TLP6.4@92.952,56.261 ; TLP6.4 93.98,54.864 R-2.6 ; R-2.6@97.095,54.423 ccw(c96.032,53.36) 96.032,54.864 ccw(c96.032,56.368) R-2.6@97.095,55.305 ; R-2.6@97.275,54.603 ccw(c96.645,53.973) 96.645,54.864 ccw(c96.645,55.755) R-2.6@97.275,55.125
TLP16: R-2.4 TLP7.4 | length 13.1
  Bottom Layer w0.254: TLP7.4 96.139,51.181 R-2.4 ; TLP7.4@92.844,50.92 cw(c93.474,50.29) 93.474,51.181 cw(c93.474,52.072) TLP7.4@92.844,51.442 ; TLP7.4@93.024,50.74 cw(c94.087,49.677) 94.087,51.181 cw(c94.087,52.685) TLP7.4@93.024,51.622 ; R-2.4@96.913,49.784 ccw(c95.409,49.784) 96.472,50.848 ccw(c97.536,51.911) R-2.4@97.536,50.407 ; R-2.4@97.167,49.784 ccw(c96.276,49.784) 96.906,50.414 ccw(c97.536,51.044) R-2.4@97.536,50.153
TLP17: R-2.2 TLP8.4 | length 13.1
  Bottom Layer w0.254: TLP8.4 96.139,46.101 R-2.2 ; TLP8.4@92.844,45.84 cw(c93.474,45.21) 93.474,46.101 cw(c93.474,46.992) TLP8.4@92.844,46.362 ; TLP8.4@93.024,45.66 cw(c94.087,44.597) 94.087,46.101 cw(c94.087,47.605) TLP8.4@93.024,46.542 ; R-2.2@96.913,44.704 ccw(c95.409,44.704) 96.472,45.768 ccw(c97.536,46.831) R-2.2@97.536,45.327 ; R-2.2@97.167,44.704 ccw(c96.276,44.704) 96.906,45.334 ccw(c97.536,45.964) R-2.2@97.536,45.073
XTAL1: CX2.1 STC89C52RC.19 Y1.1 | length 25.1
  Bottom Layer w0.254: STC89C52RC.19 CX2.1 63.119,48.26 ; STC89C52RC.19@54.49,47.999 cw(c55.12,47.369) 55.12,48.26 cw(c55.12,49.151) STC89C52RC.19@54.49,48.521 ; STC89C52RC.19@54.67,47.819 cw(c55.733,46.756) 55.733,48.26 cw(c55.733,49.764) STC89C52RC.19@54.67,48.701 ; CX2.1@59.63,47.819 ccw(c58.567,46.756) 58.567,48.26 ccw(c58.567,49.764) CX2.1@59.63,48.701 ; CX2.1@59.81,47.999 ccw(c59.18,47.369) 59.18,48.26 ccw(c59.18,49.151) CX2.1@59.81,48.521 ; CX2.1@60.332,47.999 cw(c60.962,47.369) 60.962,48.26 cw(c60.962,49.151) CX2.1@60.332,48.521 ; CX2.1@60.512,47.819 cw(c61.575,46.756) 61.575,48.26 cw(c61.575,49.764) CX2.1@60.512,48.701 ; Y1.1@63.501,49.246 cw(c62.194,49.185) 63.119,48.26 ; Y1.1@63.754,49.258 cw(c62.971,49.221) 63.525,48.666 cw(c64.08,48.112) Y1.1@64.117,48.895 ; Y1.1@64.105,48.642 ccw(c64.044,47.335) 63.119,48.26 ; Y1.1 63.119,48.26
XTAL2: CX1.1 STC89C52RC.18 Y1.2 | length 29.5
  Bottom Layer w0.254: STC89C52RC.18 56.642,50.8 57.212,51.37 57.212,55.942 57.658,56.388 CX1.1 63.373,56.388 64.135,55.626 ; STC89C52RC.18@54.49,50.539 cw(c55.12,49.909) 55.12,50.8 cw(c55.12,51.691) STC89C52RC.18@54.49,51.061 ; STC89C52RC.18@54.67,50.359 cw(c55.733,49.296) 55.733,50.8 cw(c55.733,52.304) STC89C52RC.18@54.67,51.241 ; CX1.1@59.63,55.947 ccw(c58.567,54.884) 58.567,56.388 ccw(c58.567,57.892) CX1.1@59.63,56.829 ; CX1.1@59.81,56.127 ccw(c59.18,55.497) 59.18,56.388 ccw(c59.18,57.279) CX1.1@59.81,56.649 ; CX1.1@60.332,56.127 cw(c60.962,55.497) 60.962,56.388 cw(c60.962,57.279) CX1.1@60.332,56.649 ; CX1.1@60.512,55.947 cw(c61.575,54.884) 61.575,56.388 cw(c61.575,57.892) CX1.1@60.512,56.829 ; Y1.2@63.754,54.864 ccw(c63.183,55.626) 64.135,55.626 ; Y1.2 64.135,55.626 ; Y1.2@64.516,54.864 cw(c65.087,55.626) 64.135,55.626
pads on no net: ?.0 STC89C52RC.10 STC89C52RC.11 STC89C52RC.12 STC89C52RC.13 STC89C52RC.14 STC89C52RC.15 STC89C52RC.16 STC89C52RC.17 STC89C52RC.21 STC89C52RC.22 STC89C52RC.23 STC89C52RC.24 STC89C52RC.25 STC89C52RC.26 STC89C52RC.27 STC89C52RC.28 STC89C52RC.29 STC89C52RC.30 STC89C52RC.32 STC89C52RC.33 STC89C52RC.34 STC89C52RC.35 STC89C52RC.36 STC89C52RC.37 STC89C52RC.38 STC89C52RC.39 U2.0 U3.0

## Polygon pours and split planes (outlines as drawn)
no net on Top Layer (hatched 45Degree grid 0.508 track 0.203): 51.308,125.73 51.308,26.797 150.749,26.797 150.749,126.238 51.308,126.238

## Keep-outs
Keep-Out Layer:
  lines w0.254: 50.927,26.543 51.054,26.416 151.257,26.416 151.257,126.746 50.927,126.746 50.927,26.543

## Silkscreen, mask and mechanical layers (free items; w line width, h text height)
Top Overlay:
  text "+12V" at 56.007,117.983 h1.52
  text "GND" at 56.642,104.013 h1.52
  text "." at 95.25,99.06 h1.52
  text "." at 95.25,62.484 h1.52
Mechanical 1:
  lines w0.254: 47.627,27.941 48.133,26.416 ; 47.75,125.35 48.26,126.873 ; 47.879,26.416 48.387,26.416 ; 48.006,126.873 48.514,126.873 ; 48.185,67.351 48.133,26.416 ; 48.208,85.938 48.26,126.873 ; 48.643,27.939 48.133,26.416 ; 48.766,125.348 48.26,126.873 ; 50.927,26.416 50.927,126.746 151.257,126.746 151.257,26.416 50.927,26.416
  text "100.4571 (mm)" at 49.099,67.604 h1.12 r89.93

## Text inside footprints (layer, text, board x,y; h text height)
U2: Top Overlay "1" at 101.951,99.898 h1.12 r270; Top Overlay "15" at 101.78,78.436 h1.12 r270
U3: Top Overlay "1" at 101.951,63.83 h1.12 r270; Top Overlay "15" at 101.78,42.368 h1.12 r270